# Altium PCB PCB_TRANSCIEVER.PcbDoc (part 1 of 2)
Units mm, origin at the board's own origin, x right, y up, seen from the top; angles counter-clockwise.
Board outline 68.83 x 64.26 mm, 4 copper layers (TOP, GND, 3v3, BOT), stack 1.554 mm thick; 95 components, 64 nets, 336 pads, 537 vias.
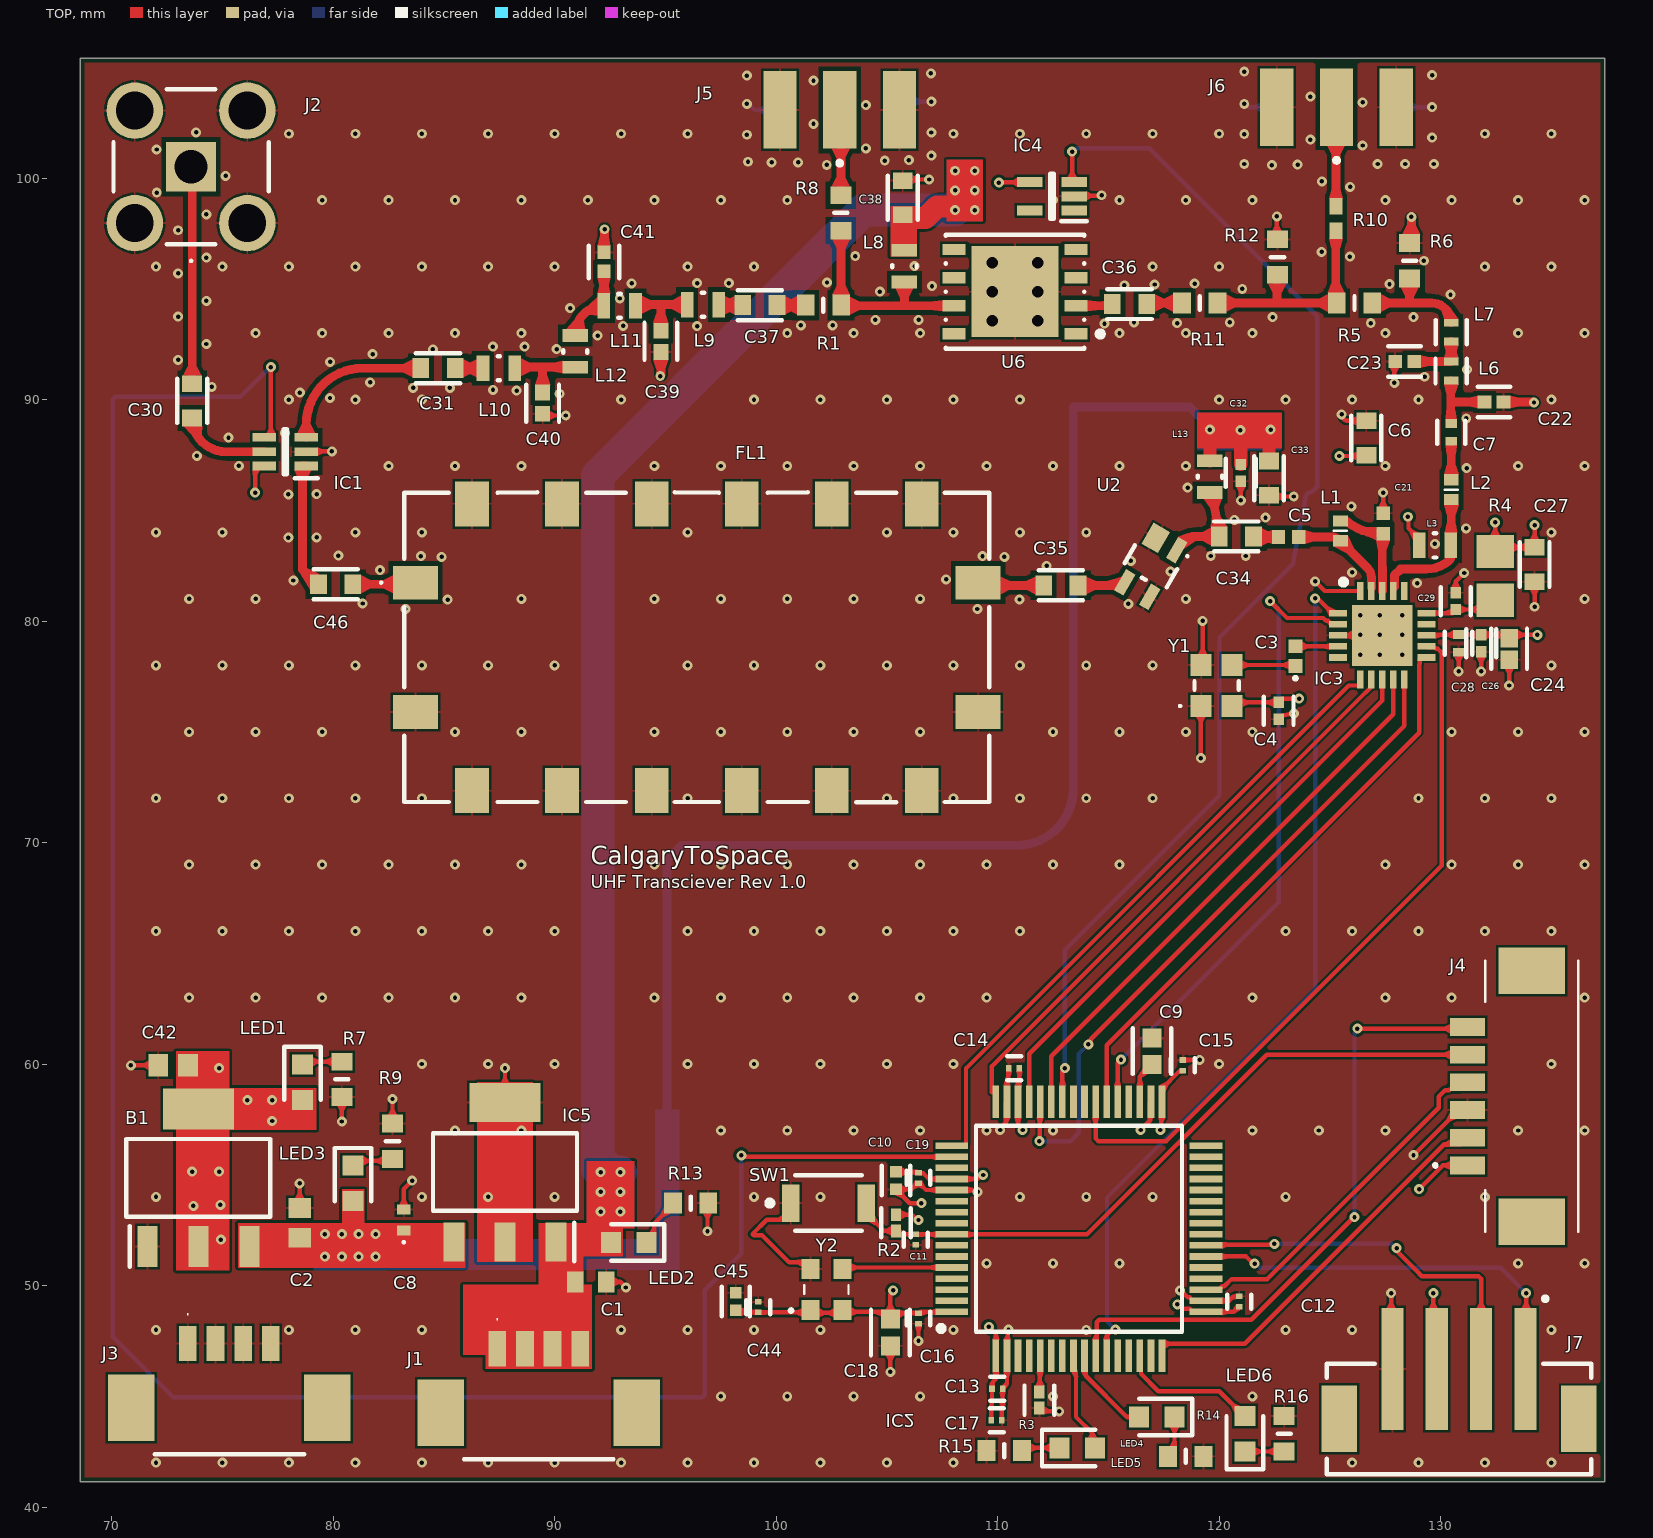
[diagram p0: TOP view]
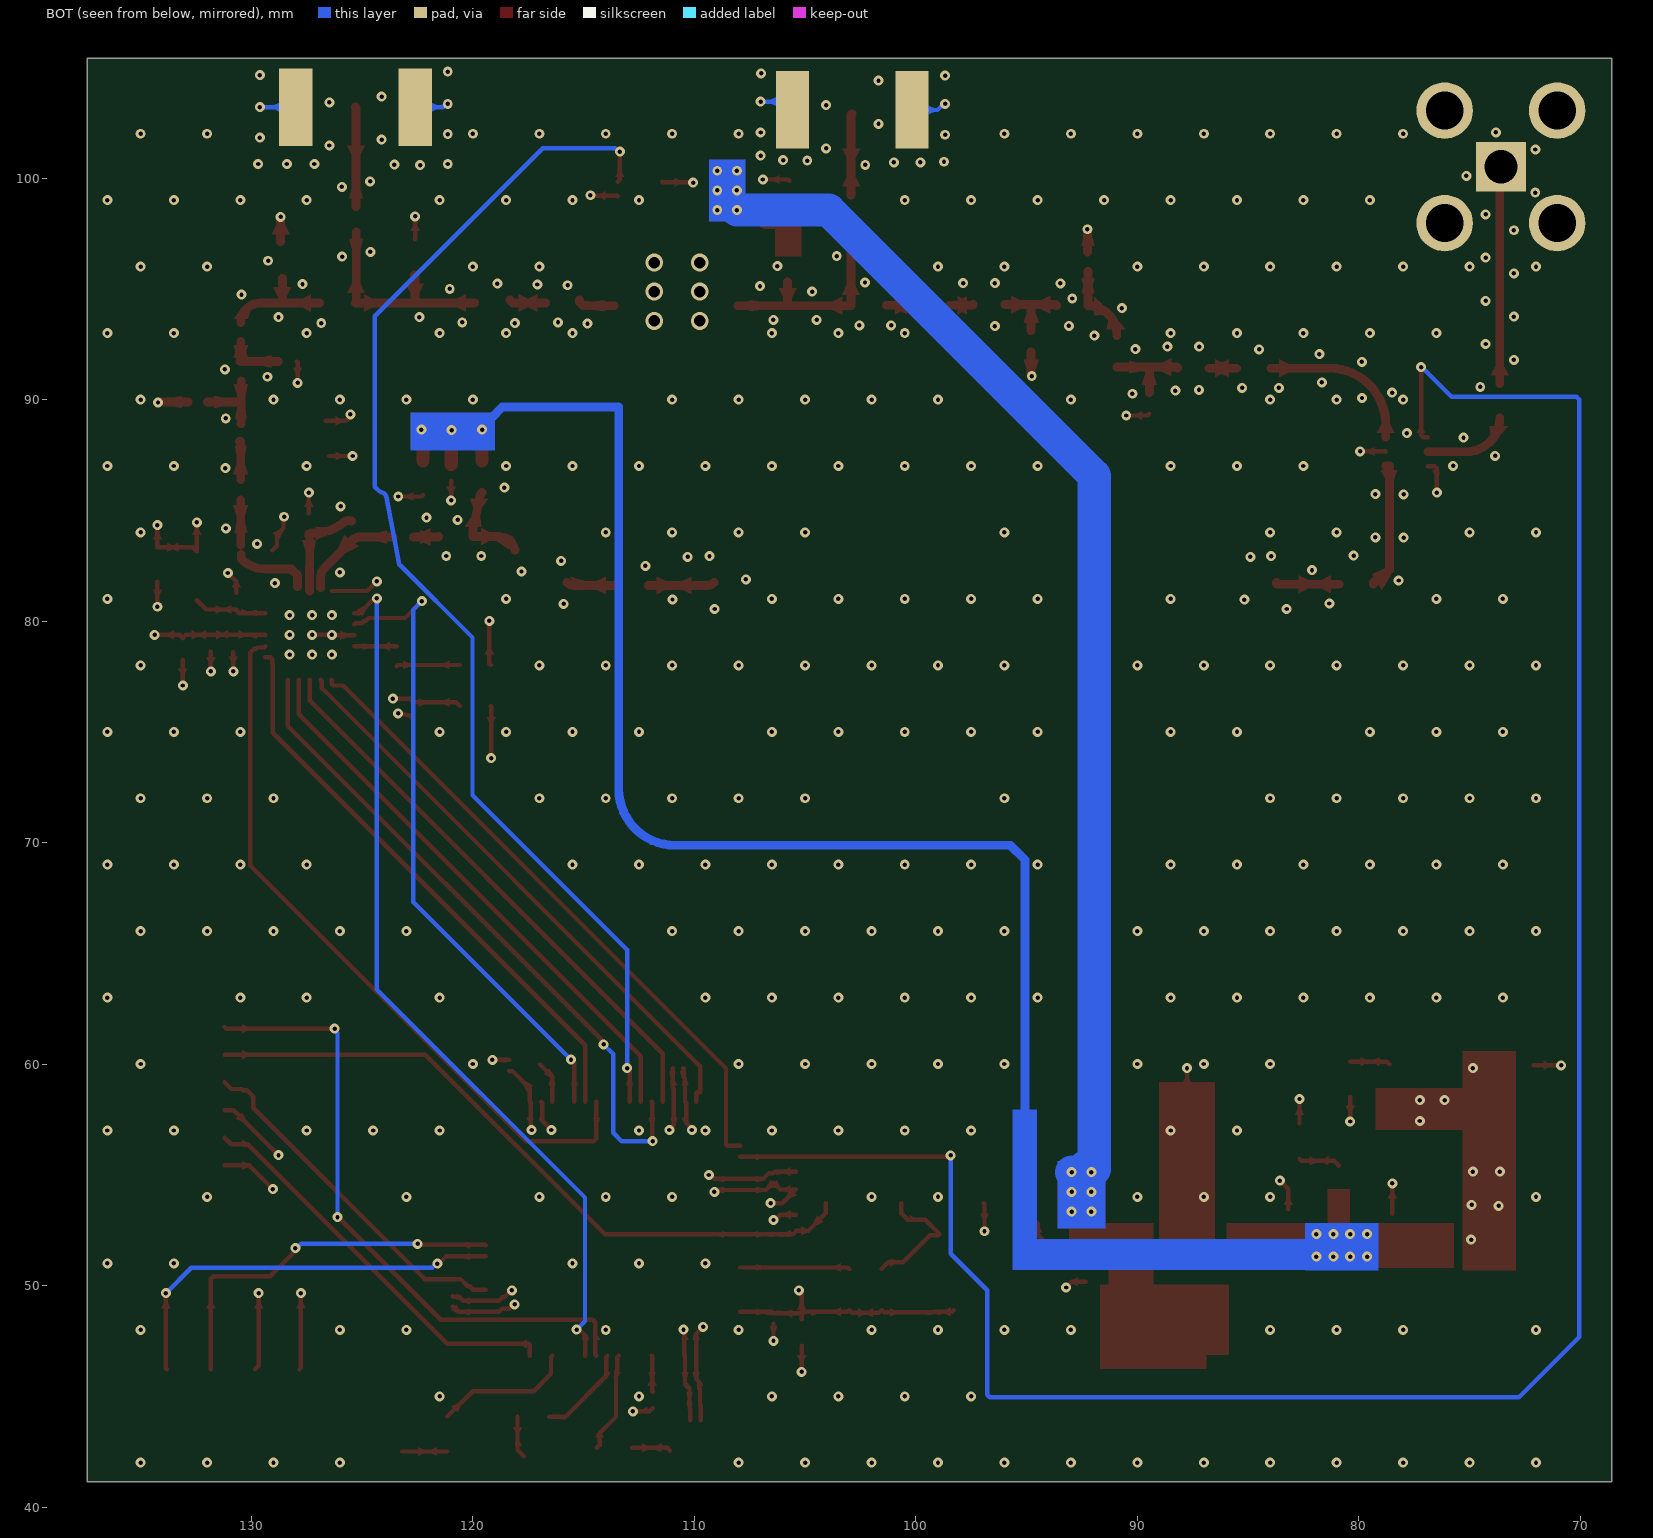
[diagram p1: BOT view, seen from below]
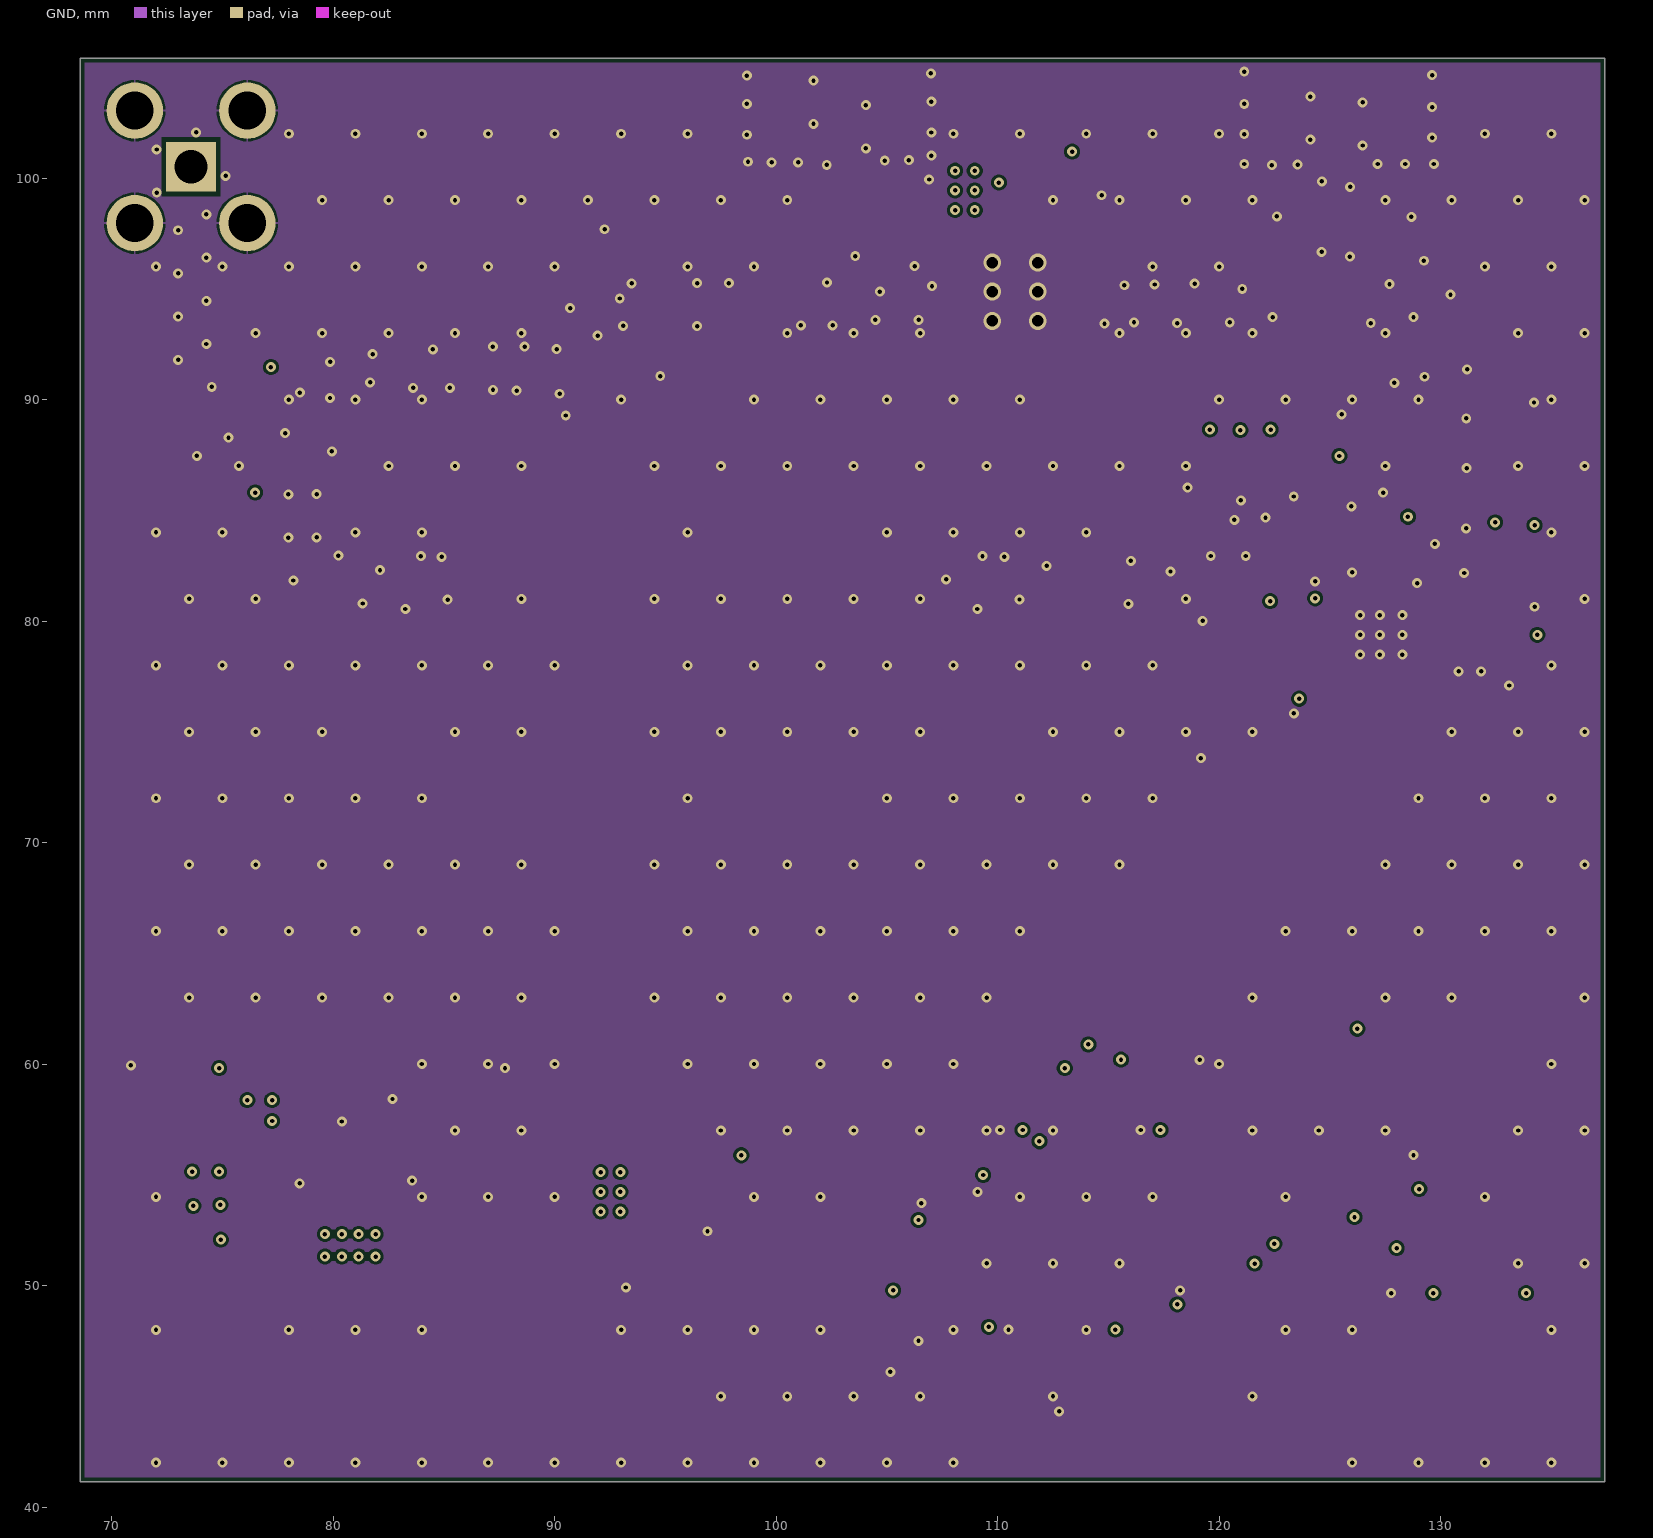
[diagram p2: GND]
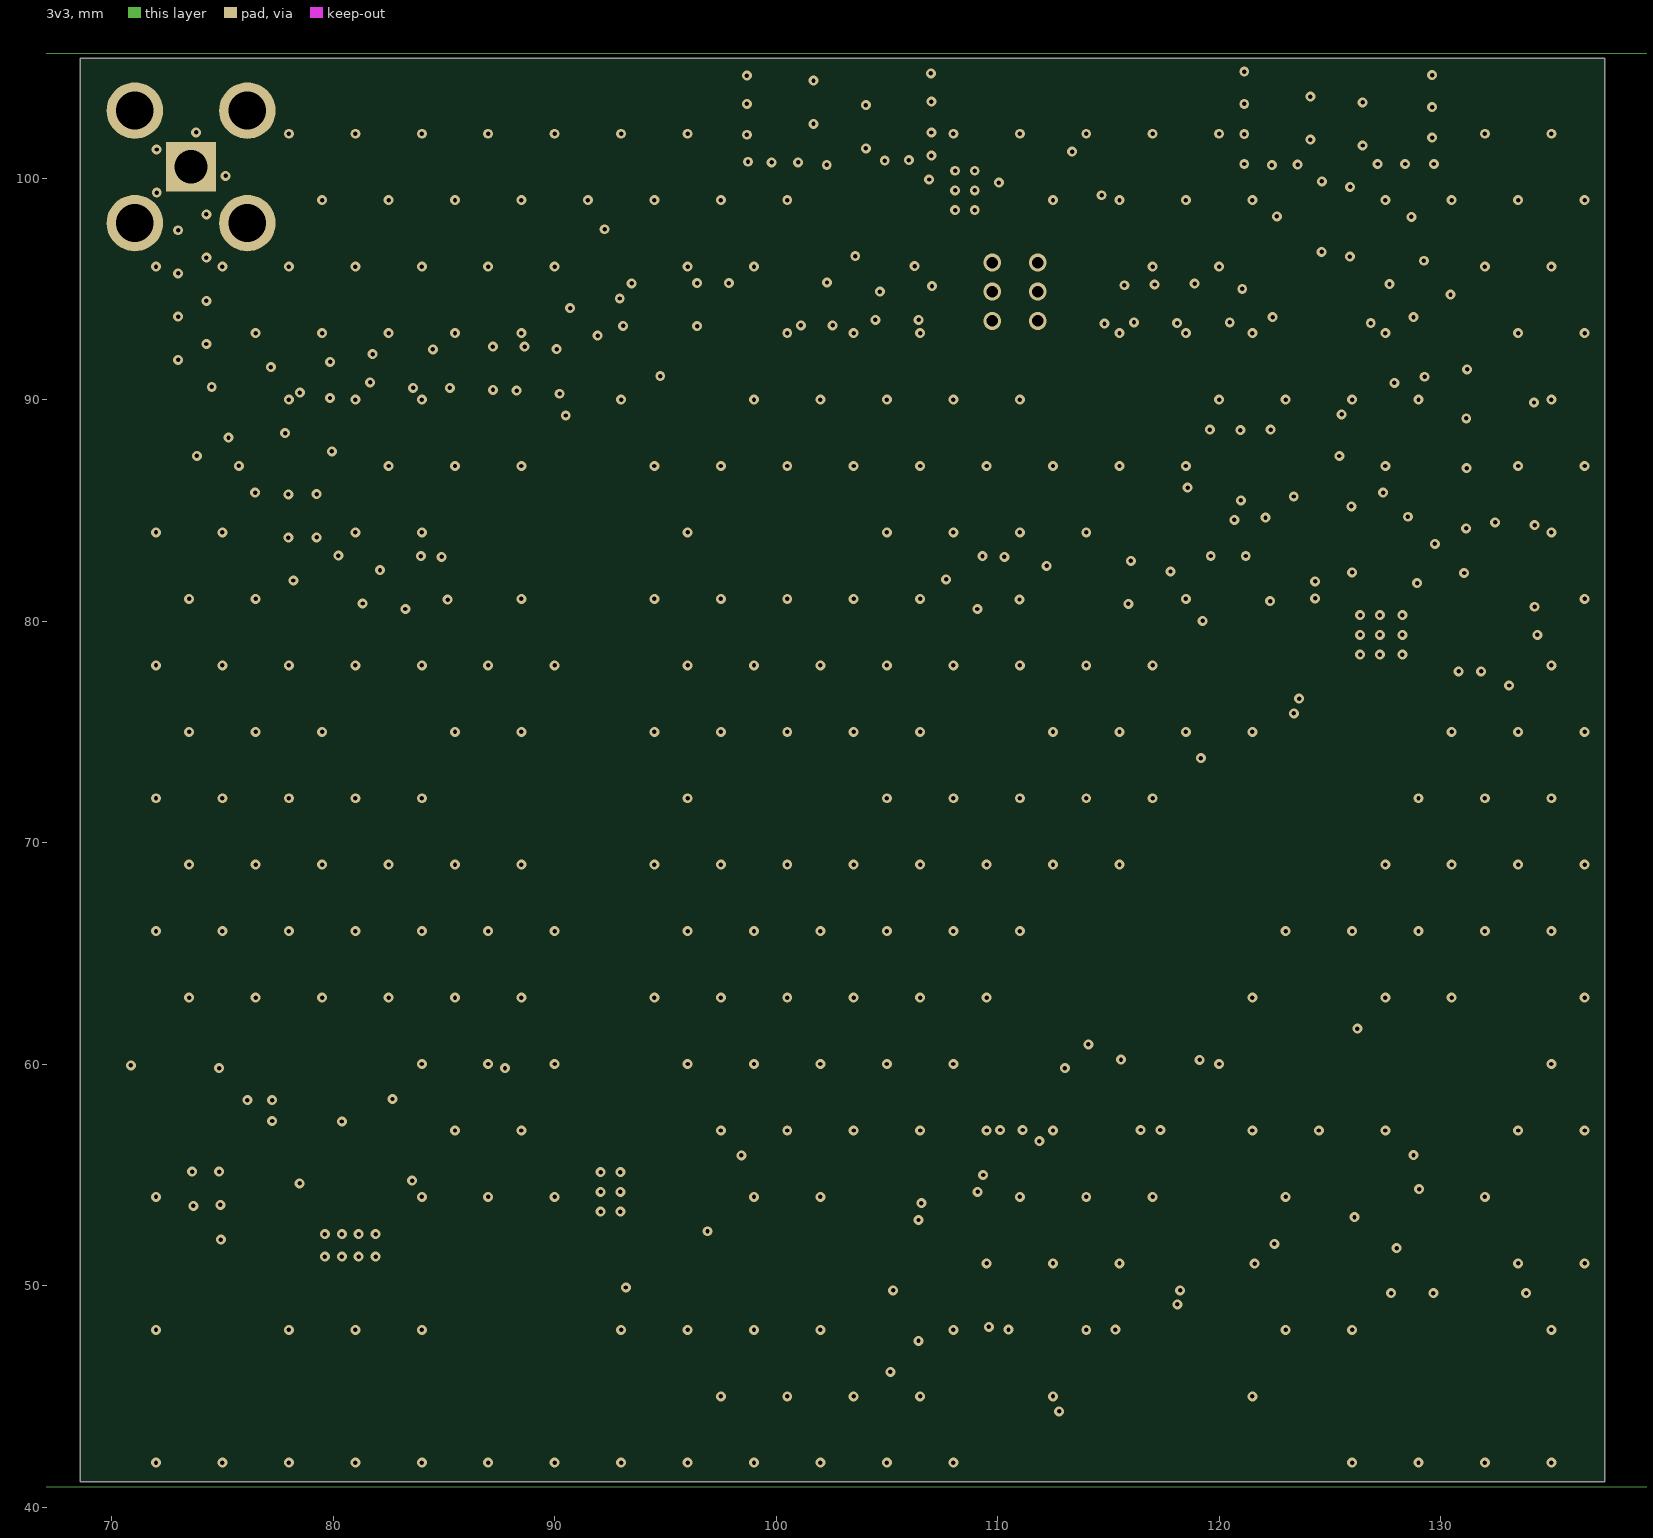
[diagram p3: 3v3]
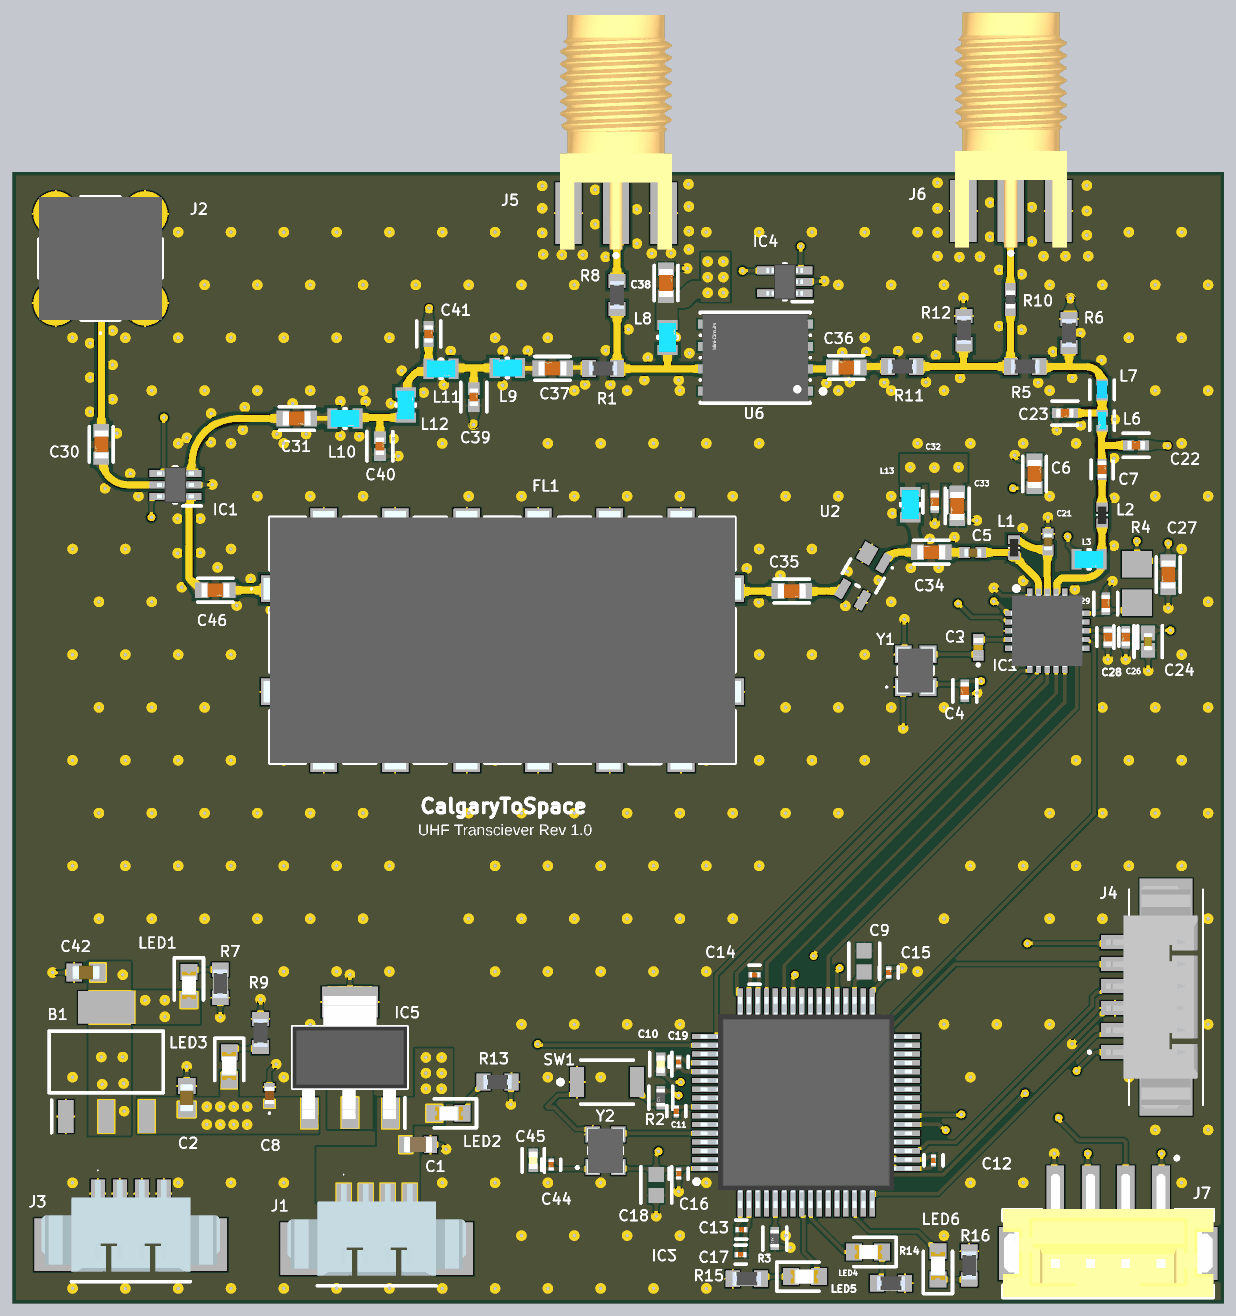
[diagram p5: 3D render of the assembled board from above, using the file's embedded part models]

## Layer stack, top to bottom
Top Solder: solder mask 0.0152, Solder Resist, Dk 3.8
TOP: signal copper 0.035
Dielectric 1: prepreg 0.218, NP-155F, Dk 4.4
Dielectric 2: prepreg 0.0764, NP-155F, Dk 3.91
GND: signal copper 0.0152
Dielectric 3: core 0.865, NP-155F, Dk 4.43
3v3: signal copper 0.0152
Dielectric 4: prepreg 0.0764, NP-155F, Dk 3.91
Dielectric 5: prepreg 0.218, NP-155F, Dk 4.4
BOT: signal copper 0.035
Bottom Solder: solder mask 0.0152, Solder Resist, Dk 3.8

## Board outline
68.58,41.148 68.58,105.41 137.414,105.41 137.414,41.148

## Design rules (kind name [scope] priority, off if disabled: settings)
BoardOutlineClearance [All] p1: gap=0.2 ignorepadtopadclearanceinfootprint=FALSE
Clearance CPWG_NEARIC [InNetClass('RF') vs InNet('GND') And InComponent('IC3')] p1: gap=0.125 ignorepadtopadclearanceinfootprint=FALSE
Clearance CPWG [InNetClass('RF') vs InNet('GND')] p2: gap=0.2 ignorepadtopadclearanceinfootprint=FALSE
Clearance Clearance_1 [All] p3: gap=0.102 ignorepadtopadclearanceinfootprint=FALSE except(0.127: Arc-Via Track-Via SMDPad-Via THPad-Via Via-Via Via-Fill Via-Poly Via-Region Via-Text; 0.15: THPad-THPad; 0.25: Arc-Hole Track-Hole SMDPad-Hole THPad-Hole Via-Hole Fill-Hole Poly-Hole Region-Hole Text-Hole)
ComponentClearance [All] p1: gap=0.102 collisioncheckmode=3 verticalgap=0.102 showdistances=TRUE
DiffPairsRouting [All] p1: maxlimit=0.102 minlimit=0.102 mostfreqgap=0.102 toplayer_minwidth=0.102 toplayer_maxwidth=1816.048 toplayer_prefwidth=0.102 midlayer1_minwidth=0.102 midlayer1_maxwidth=1816.048 midlayer1_prefwidth=0.102 midlayer2_minwidth=0.102 midlayer2_maxwidth=1816.048 midlayer2_prefwidth=0.102 bottomlayer_minwidth=0.102 bottomlayer_maxwidth=1816.048 bottomlayer_prefwidth=0.102 maxuncoupledlength=12.7
Height [All] p1: minheight=0 maxheight=1816.048 prefheight=12.7
HoleSize [All] p1: absolutevalues=TRUE maxlimit=6.3 minlimit=0.2 maxpercent=80.000 minpercent=20.000
HoleToHoleClearance [All] p1: gap=0.25 allowstackedmicrovias=FALSE
MaxMinImpedance "Schematic Impedance Constraint_1" [InNetClass('RF')] p1: minimum=50.00 maximum=50.00
MinimumAnnularRing [All] p1: minimumring=0.076
MinimumSolderMaskSliver [All] p1: minsoldermaskwidth=0
PlaneClearance [All] p1: clearance=0.102
PlaneConnect PlaneConnectPowerPads [InPadClass('PowerPads')] p1: planeconnectstyle=Direct reliefexpansion=0.508 reliefentries=4 reliefconductorwidth=0.254 reliefairgap=0.254
PlaneConnect [All] p2: pad.planeconnectstyle=Relief pad.reliefexpansion=0.3 pad.reliefentries=4 pad.reliefconductorwidth=0.102 pad.reliefairgap=0.102 via.planeconnectstyle=Direct via.reliefexpansion=0.3 via.reliefentries=4 via.reliefconductorwidth=0.127 via.reliefairgap=0.127
PolygonConnect PolygonConnectPowerPads [All vs (InPadClass('PowerPads'))] p1: connectstyle=Direct reliefconductorwidth=0.254 reliefentries=4 polygonreliefangle="90 Angle" airgapwidth=0.254
PolygonConnect [All] p2: thpad.connectstyle=Relief thpad.reliefconductorwidth=0.102 thpad.reliefentries=4 thpad.polygonreliefangle="90 Angle" thpad.airgapwidth=0.102 smdpad.connectstyle=Relief smdpad.reliefconductorwidth=0.102 smdpad.reliefentries=4 smdpad.polygonreliefangle="90 Angle" smdpad.airgapwidth=0.102 via.connectstyle=Direct via.reliefconductorwidth=0.127 via.reliefentries=4 via.polygonreliefangle="90 Angle" via.airgapwidth=0.127
RoutingVias [All] p1: holewidth=0.2 width=0.45 viastyle="Through Hole" minholewidth=0.2 minwidth=0.45 maxholewidth=6.3 maxwidth=6.55 viatemplateguid#1={1691019E-FDFA-4216-BD2A-34D3C3097EAC} viatemplatename#1=v45h20
SilkToSilkClearance [All] p1: silktosilkclearance=0
SilkToSolderMaskClearance [IsPad] p1: minsilkscreentomaskgap=0.102 clearancetoexposedcopper=TRUE
SolderMaskExpansion [All] p1: expansion=0.075 istentingtop=FALSE
SupplyNets "Schematic Supply Nets" [InNet('12V')] p1: voltage=0.000
SupplyNets "Schematic Supply Nets_2" [InNet('GND')] p2: voltage=0.000
SupplyNets "Schematic Supply Nets_3" [InNet('3V3')] p3: voltage=0.000
SupplyNets "Schematic Supply Nets_7" [InNet('+5V')] p4: voltage=0.000
UnRoutedNet [All] p1: checkbadconnections=TRUE
Width Width_1 [Not InNetClass('RF')] p1: maxlimit=5 minlimit=0.15 preferedwidth=0.2 minimp=50.000000 maximp=50.000000 favimp=50.000000
Width [InNetClass('RF')] p2: maxlimit=1816.048 minlimit=0.102 preferedwidth=0.4 toplayer_minwidth=0.4 toplayer_maxwidth=0.4 bottomlayer_minwidth=0.4 bottomlayer_maxwidth=0.4 impedanceprofiledriven=TRUE impedanceprofileid={D937DB2E-A1DA-42B8-B0BA-F8F9A3893C23} impedanceprofilevalue=50.000000 minimp=50.000000 maximp=50.000000 favimp=50.000000
19 further rules are at their usual default settings.

## Classes and differential pairs
net class RF: NetC5_1 NetC7_1 NetC7_2 NetC23_2 NetC30_1 NetC30_2 NetC31_1 NetC31_2 NetC34_2 NetC35_1 NetC35_2 NetC36_1 NetC36_2 NetC37_1 NetC37_2 NetC39_2 NetC40_2 NetC41_1 NetC46_1 NetC46_2 NetL7_1 NetL8_1 NetR5_1 RX_N RX_P SI_TEST SMA_PA_OUT TX
component class SW+ANT: C30 C31 IC1 J2
component class STM32: C9 C10 C11 C12 C13 C14 C15 C16 C17 C18 C19 C44 C45 IC2 J4 J7 LED4 LED5 LED6 R2 R3 R14 R15 R16 SW1 U8 Y2
component class Power: B1 C1 C2 C8 C42 IC5 J1 J3 LED1 LED2 LED3 R7 R9 R13
component class LPF: C36 C37 C38 C39 C40 C41 IC4 J5 L8 L9 L10 L11 L12 R1 R8 U6
component class Chip: C3 C4 C5 C6 C7 C21 C22 C23 C24 C26 C27 C28 C29 IC3 J6 L1 L2 L3 L6 L7 R4 R5 R6 R10 R11 R12 Y1 z
component class BPF+LNA: C32 C33 C34 C35 C46 FL1 L13 U2

## Components (designator, comment, footprint, x,y, rotation, side; value= is the part's Value field where it differs from the comment)
B1 "AZ1117IH-3.3TRG1" SOT230P700X180-4N#1 73.914,54.864 r90 top
C1 "0.47uF" CAPC1608X90N 91.629,50.165 r180 top
C2 "22uF" CAPC1608X100N 78.486,52.832 r90 top
C3 "1000pF" C0402 123.444,78.417 r90 top
C4 "100 nF" FP-GCM155-0_05-IPC_C 122.682,75.946 r270 top
C5 "5.6pF" CAPC1005X55N 123.139,83.795 r0 top
C6 "100 pF" FP-GQM187-0_15-MFG 126.644,88.265 r90 top
C7 "8.2 pF" FP-GJM155-0_05-MFG 130.48,88.519 r90 top
C8 "10uF" GRM15x 83.185,52.959 r90 top
C9 "4.7 uF" FP-GRM188-0_15-IPC_C 116.967,60.579 r90 top
C10 "1 uF" FP-C0402C105K9PACTU-MFG 105.41,54.737 r270 top
C11 "0.1 uF" FP-GRM033-0_03-MFG 106.299,52.07 r90 top
C12 "0.1 uF" FP-GRM033-0_03-MFG 120.904,49.276 r270 top
C13 "0.1 uF" FP-GRM033-0_03-MFG 109.982,45.339 r180 top
C14 "0.1 uF" FP-GRM033-0_03-MFG 110.744,59.817 r0 top
C15 "0.1 uF" FP-GRM033-0_03-MFG 118.364,59.944 r270 top
C16 "0.1 uF" FP-GRM033-0_03-MFG 106.426,48.514 r90 top
C17 "0.1 uF" FP-GRM033-0_03-MFG 109.957,43.917 r180 top
C18 "4.7 uF" FP-GRM188-0_15-IPC_C 105.156,47.879 r270 top
C19 "0.1 uF" FP-GRM033-0_03-MFG 106.426,54.864 r270 top
C21 "4pF" CAPC1005X55N 127.406,84.404 r270 top
C22 "13 pF" FP-GJM155-0_05-IPC_B 132.41,89.891 r180 top
C23 "9.1 pF" FP-GJM155-0_05-IPC_B 128.372,91.719 r0 top
C24 "2.2 uF" FP-GRM155-0_2-IPC_A 133.096,78.74 r270 top
C26 "100 nF" FP-GCM155-0_05-IPC_C 131.826,78.994 r270 top
C27 "100 pF" FP-GQM187-0_15-MFG 134.239,82.55 r270 top
C28 "33 pF" FP-GJM155-0_05-MFG 130.81,78.994 r270 top
C29 "100 nF" FP-GCM155-0_05-IPC_C 130.683,80.899 r90 top
C30 "100 pF" FP-GQM187-0_15-MFG 73.635,89.941 r270 top
C31 "100 pF" FP-GQM187-0_15-MFG 84.734,91.415 r0 top
C32 "100 nF" FP-GCM155-0_05-IPC_C 120.98,86.688 r270 top
C33 "100 pF" FP-GQM187-0_15-MFG 122.25,86.449 r270 top
C34 "100 pF" FP-GQM187-0_15-MFG 120.777,83.82 r180 top
C35 "100 pF" FP-GQM187-0_15-MFG 112.852,81.61 r0 top
C36 "100 pF" FP-GQM187-0_15-MFG 115.951,94.31 r180 top
C37 "100 pF" FP-GQM187-0_15-MFG 99.263,94.259 r180 top
C38 "100 pF" FP-GQM187-0_15-MFG 105.715,99.111 r90 top
C39 "9.8 pF" FP-GJM155-0_05-IPC_A 94.793,92.63 r90 top
C40 "9.8 pF" FP-GJM155-0_05-IPC_A 89.459,89.84 r90 top
C41 "11.0 pF" FP-GJM155-0_05-IPC_B 92.227,96.215 r90 top
C42 "22uF" CAPC1608X100N 72.771,59.944 r180 top
C44 "0.1 uF" FP-GRM033-0_03-MFG 99.187,49.022 r90 top
C45 "1 uF" FP-C0402C105K9PACTU-MFG 98.171,49.276 r90 top
C46 "100 pF" FP-GQM187-0_15-MFG 80.112,81.661 r0 top
FL1 "BPF-BV435+" BPFBV435 96.418,78.816 r0 top
IC1 "4259-63" SOT65P210X110-6N 77.836,87.645 r180 top
IC2 "STM32F401RBT6" QFP50P1200X1200X160-64N 113.671,52.563 r0 top
IC3 "Si4463-B1B-FMR" QFN50P400X400X90-21N-D 127.364,79.356 r270 top
IC4 "MCP9700AT-E_LT" SOT65P210X110-5N 112.455,99.177 r180 top
IC5 "LM2940IMPX-5.0_NOPB" SOT230P700X180-4N#2 87.757,55.118 r90 top
J1 "0532610471" 0532610471 89.281,46.355 r0 top
J2 "RFPC-SMA28-F" RFPCSMA28F 73.584,100.508 r90 top
J3 "0532610471" 0532610471 75.311,46.584 r0 top
J4 "53261-0671" 532610671 134.112,58.547 r90 top
J5 "CON-SMA-EDGE-S" RFSOLUTIONS_CON-SMA-EDGE-S 102.87,103.073 r270 top
J6 "CON-SMA-EDGE-S" RFSOLUTIONS_CON-SMA-EDGE-S 125.298,103.2 r270 top
J7 "B4B-PH-SM4-TB_LF__SN_" B4B-PH-SM4_1 130.826,41.478 r180 top
L1 "40nH" LQW15CNR20J00B 125.476,84.074 r90 top
L2 "33nH" LQW15CNR20J00B 130.48,85.928 r90 top
L3 "220 nH" FP-LQW18AN_80-MFG 129.743,83.414 r0 top
L6 "27 nH" FP-LQW15AN_00-W0_5-0_1-MFG 130.48,91.288 r270 top
L7 "22 nH" FP-LQW15AN_00-W0_6-0_1-MFG 130.48,93.04 r270 top
L8 "220 nH" FP-LQW18AN_80-MFG 105.791,96.021 r90 top
L9 "17 nH" FP-LQW18AN_80-MFG 96.698,94.285 r180 top
L10 "17 nH" FP-LQW18AN_80-MFG 87.478,91.415 r0 top
L11 "36 nH" FP-LQW18AN_80-MFG 92.935,94.234 r0 top
L12 "36 nH" FP-LQW18AN_80-MFG 90.932,92.177 r90 top
L13 "220 nH" FP-LQW18AN_80-MFG 119.583,86.516 r270 top
LED1 "LTST-C190KGKT" LEDC1608X80N 78.613,59.182 r270 top
LED2 "LTST-C190KGKT" LEDC1608X80N 93.345,51.943 r180 top
LED3 "LTST-C190KGKT" LEDC1608X80N 80.899,54.61 r270 top
LED4 "LTST-C190KGKT" LEDC1608X80N 117.183,44.069 r180 top
LED5 "LTST-C190KGKT" LEDC1608X80N 113.602,42.672 r0 top
LED6 "LTST-C190KGKT" LEDC1608X80N 121.158,43.307 r90 top
R1 "0R" RESC1608X55N 102.133,94.259 r0 top
R2 "10k" FP-RMCF0402-IPC_C 105.41,52.832 r90 top
R3 "10k" FP-RMCF0402-IPC_C 111.887,44.831 r90 top
R4 "4R7" RESC3216X65X100LL20T15 132.461,82.042 r270 top
R5 "0R" RESC1608X55N 126.111,94.361 r0 top
R6 "0R" RESC1608X55N 128.6,96.266 r270 top
R7 "1k" RESC1608X55N 80.391,59.309 r270 top
R8 "0R" RESC1608X55N 102.921,98.425 r270 top
R9 "1k" RESC1608X55N 82.677,56.515 r90 top
R10 "0R" RESC1005X40N 125.273,98.171 r270 top
R11 "0R" RESC1608X55N 119.126,94.361 r0 top
R12 "0R" RESC1608X55N 122.631,96.431 r270 top
R13 "4.7k" RESC1608X55N 96.139,53.721 r180 top
R14 "1k" RESC1608X55N 118.491,42.291 r0 top
R15 "1k" RESC1608X55N 110.299,42.545 r180 top
R16 "1k" RESC1608X55N 122.936,43.307 r90 top
SW1 "B3U-1000P" OMRON-B3U-1000_V 102.362,53.721 r0 top
U2 "SPF5043Z" RFMD-SOT343-4_M 116.916,82.474 r240 top
U6 "PHA-202+" FP-DL1636-MFG 110.783,94.869 r180 top
Y1 "FT2MNTUM-30.0-T1" FT2MNTUM300T1 119.888,77.089 r90 top
Y2 "ECS-TXO-2520-33-250-AN-TR" ECSTXO252033250ANTR 102.272,49.82 r90 top

## Footprints (in the part's own frame and the unit in brackets; to place one, negate y for a bottom-side part, rotate by r counter-clockwise, add the part's x,y. Pads: shape width x height; smd on the part's side, far side on the other; paste and mask are expansions set on the pad)
0532610471 [mm]
  rect 0.8x1.6 smd: 1(-1.875,0.8) 2(-0.625,0.8) 3(0.625,0.8) 4(1.875,0.8)
  rect 2.1x3 smd: MP1(4.425,-2.1) MP2(-4.425,-2.1)
  silkscreen extent -3.37,-4.2 3.37,2.14, body extent -5.07,-3.63 5.07,1.57, height 3.4
532610671 [mm]
  rect 0.8x1.6 smd: 1(-3.125,2.9) 2(-1.875,2.9) 3(-0.625,2.9) 4(0.625,2.9) 5(1.875,2.9) 6(3.125,2.9)
  rect 2.1x3 smd: MP1(-5.675,0) MP2(5.675,0)
  silkscreen extent -6.12,-2.1 6.12,4.4, body extent -6.32,-1.8 6.32,3.4, height 3.4
B4B-PH-SM4_1 [mm]
  rect 1x5.5 smd: 1(-3,-4.75) 2(-1,-4.75) 3(1,-4.75) 4(3,-4.75)
  rect 1.6x3 smd: 5(5.4,-2.5) 6(-5.4,-2.5)
  silkscreen extent -5.97,-8.02 5.97,0, body extent -5.98,-7.03 5.97,-0.03, height 6.8
BPFBV435 [mm]
  rect 2.03x1.52 smd: 1(-12.7,2.92) 2(-12.7,-2.92) 9(12.7,-2.92) 10(12.7,2.92)
  rect 1.52x2.03 smd: 3(-10.15,-6.475) 4(-6.09,-6.475) 5(-2.03,-6.475) 6(2.03,-6.475) 7(6.09,-6.475) 8(10.15,-6.475) 11(10.15,6.475) 12(6.09,6.475) 13(2.03,6.475) 14(-2.03,6.475) 15(-6.09,6.475) 16(-10.15,6.475)
  silkscreen extent -14.3,-7 13.21,7, body extent -13.56,-7.34 13.56,7.34, height 6.45
C0402 [mm]
  rect 0.62x0.62 smd: 1(-0.45,0) 2(0.45,0)
  silkscreen extent -1.05,-0.05 -0.95,0.05, body extent -0.52,-0.27 0.53,0.28
CAPC1005X55N [mm]
  rect 0.6x0.62 smd: 1(-0.46,0) 2(0.46,0)
  body extent -0.5,-0.25 0.5,0.25, height 0.55
CAPC1608X90N [mm]
  rect 0.75x0.94 smd: 1(-0.7,0) 2(0.7,0)
  body extent -0.8,-0.45 0.8,0.45, height 0.8
CAPC1608X100N [mm]
  rect 0.89x1.02 smd: 1(-0.67,0) 2(0.67,0)
  body extent -0.8,-0.4 0.8,0.4, height 1
ECSTXO252033250ANTR [mm]
  rect 0.9x0.8 smd: 1(-0.925,0.725) 2(0.925,0.725) 3(0.925,-0.725) 4(-0.925,-0.725)
  silkscreen extent -1,-1 0.2,1.65, body extent -1.3,-1.04 1.3,1.04, height 1.1
FP-C0402C105K9PACTU-MFG [mm]
  rect 0.52x0.52 smd paste+0 mask+0: 1(-0.4,0) 2(0.4,0)
  silkscreen extent -0.67,-0.64 0.67,0.64, body extent -0.5,-0.25 0.5,0.25, height 0.55
FP-DL1636-MFG [mm]
  rect 1.02x0.51 smd paste+0 mask+0: 1(-2.755,1.905) 2(-2.755,0.635) 3(-2.755,-0.635) 4(-2.755,-1.905) 5(2.755,-1.905) 6(2.755,-0.635) 7(2.755,0.635) 8(2.755,1.905)
  rect 3.94x4.11 smd paste+0 mask+0: 9(0,0)
  silkscreen extent -3.97,-2.58 3.12,2.58, body extent -3,-2.45 3,2.45, height 0.9
FP-GCM155-0_05-IPC_C [mm]
  rect 0.515x0.472 smd paste+0 mask+0: 1(-0.379,0) 2(0.379,0)
  silkscreen extent -0.64,-0.67 0.64,0.67, body extent -0.5,-0.25 0.5,0.25, height 0.55
FP-GJM155-0_05-IPC_A [mm]
  rect 0.715x0.672 smd paste+0 mask+0: 1(-0.479,0) 2(0.479,0)
  silkscreen extent -0.84,-0.74 0.84,0.74, body extent -0.5,-0.25 0.5,0.25, height 0.55
FP-GJM155-0_05-IPC_B [mm]
  rect 0.615x0.572 smd paste+0 mask+0: 1(-0.429,0) 2(0.429,0)
  silkscreen extent -0.74,-0.69 0.74,0.69, body extent -0.5,-0.25 0.5,0.25, height 0.55
FP-GJM155-0_05-MFG [mm]
  rect 0.4x0.5 smd paste+0 mask+0: 1(-0.4,0) 2(0.4,0)
  silkscreen extent -0.53,-0.63 0.53,0.63, body extent -0.5,-0.25 0.5,0.25, height 0.55
FP-GQM187-0_15-MFG [mm]
  rect 0.75x0.9 smd paste+0 mask+0: 1(-0.775,0) 2(0.775,0)
  silkscreen extent -1,-0.67 1,0.67, body extent -0.8,-0.4 0.8,0.4, height 0.8
FP-GRM033-0_03-MFG [mm]
  rect 0.25x0.3 smd paste+0 mask+0: 1(-0.238,0) 2(0.238,0)
  silkscreen extent -0.32,-0.54 0.32,0.54, body extent -0.46,-0.27 0.46,0.27, height 0.25
FP-GRM155-0_2-IPC_A [mm]
  rect 0.828x0.806 smd paste+0 mask+0: 1(-0.489,0) 2(0.489,0)
  silkscreen extent -0.9,-0.8 0.9,0.8, body extent -0.5,-0.25 0.5,0.25, height 0.7
FP-GRM188-0_15-IPC_C [mm]
  rect 0.856x0.858 smd paste+0 mask+0: 1(-0.601,0) 2(0.601,0)
  silkscreen extent -1.03,-0.87 1.03,0.87
FP-LQW15AN_00-W0_5-0_1-MFG [mm]
  rect 0.35x0.65 smd paste+0 mask+0: 1(-0.425,0) 2(0.425,0)
  silkscreen extent -0.55,-0.71 0.55,0.7, body extent -0.5,-0.25 0.5,0.25, height 0.6
FP-LQW15AN_00-W0_6-0_1-MFG [mm]
  rect 0.35x0.65 smd paste+0 mask+0: 1(-0.425,0) 2(0.425,0)
  silkscreen extent -0.55,-0.7 0.55,0.7, body extent -0.5,-0.3 0.5,0.3, height 0.6
FP-LQW18AN_80-MFG [mm]
  rect 0.57x1.15 smd paste+0 mask+0: 1(-0.715,0) 2(0.715,0)
  silkscreen extent -0.06,-0.55 0.06,0.55, body extent -0.82,-0.5 0.82,0.5, height 1
FP-RMCF0402-IPC_C [mm]
  rect 0.581x0.472 smd paste+0 mask+0: 1(-0.366,0) 2(0.366,0)
  silkscreen extent -0.66,-0.67 0.66,0.67, body extent -0.5,-0.25 0.5,0.25, height 0.4
FT2MNTUM300T1 [mm]
  rect 1x0.95 smd: 1(-0.925,0.7) 2(0.925,0.7) 3(0.925,-0.7) 4(-0.925,-0.7)
  silkscreen extent -0.97,-1 0.2,1.7, body extent -1.33,-1.08 1.33,1.08, height 1.1
GRM15x [mm]
  rect 0.45x0.6 smd: 1(-0.475,0) 2(0.475,0)
  silkscreen extent -1.05,-0.05 -0.95,0.05, body extent -0.5,-0.28 0.5,0.27, height 0.5
LEDC1608X80N [mm]
  rect 0.9x0.95 smd: 1(-0.8,0) 2(0.8,0)
  silkscreen extent -1.6,-0.82 0.8,0.82, body extent -0.83,-0.4 0.77,0.4, height 0.8
LQW15CNR20J00B [mm]
  rect 0.5x0.66 smd: 1(-0.45,0) 2(0.45,0)
  silkscreen extent 0,-0.3 0,0.3, body extent -0.5,-0.25 0.5,0.25, height 0.6
OMRON-B3U-1000_V [mm] "SMD, 2-Leads, Body 3x2.5mm"
  rect 0.8x1.7 smd: 1(-1.7,0) 2(1.7,0)
  silkscreen extent -2.77,-1.25 1.5,1.25, body extent -1.5,-1.25 1.5,1.25, height 1.75
QFN50P400X400X90-21N-D [mm]
  rect 0.8x0.3 smd: 1(-2,-1) 2(-2,-0.5) 3(-2,0) 4(-2,0.5) 5(-2,1) 11(2,1) 12(2,0.5) 13(2,0) 14(2,-0.5) 15(2,-1)
  rect 0.3x0.8 smd: 6(-1,2) 7(-0.5,2) 8(0,2) 9(0.5,2) 10(1,2) 16(1,-2) 17(0.5,-2) 18(0,-2) 19(-0.5,-2) 20(-1,-2)
  rect 2.75x2.75 smd: 21(0,0)
  silkscreen extent -2.52,-1.87 -2.28,-1.62, body extent -2.05,-2.05 2.05,2.05, height 0.9
QFP50P1200X1200X160-64N [mm]
  rect 1.475x0.3 smd: 1(-5.738,-3.75) 2(-5.738,-3.25) 3(-5.738,-2.75) 4(-5.738,-2.25) 5(-5.738,-1.75) 6(-5.738,-1.25) 7(-5.738,-0.75) 8(-5.738,-0.25) 9(-5.738,0.25) 10(-5.738,0.75) 11(-5.738,1.25) 12(-5.738,1.75) 13(-5.738,2.25) 14(-5.738,2.75) 15(-5.738,3.25) 16(-5.738,3.75) 33(5.738,3.75) 34(5.738,3.25) 35(5.738,2.75) 36(5.738,2.25) 37(5.738,1.75) 38(5.738,1.25) 39(5.738,0.75) 40(5.738,0.25) 41(5.738,-0.25) 42(5.738,-0.75) 43(5.738,-1.25) 44(5.738,-1.75) 45(5.738,-2.25) 46(5.738,-2.75) 47(5.738,-3.25) 48(5.738,-3.75)
  rect 0.3x1.475 smd: 17(-3.75,5.738) 18(-3.25,5.738) 19(-2.75,5.738) 20(-2.25,5.738) 21(-1.75,5.738) 22(-1.25,5.738) 23(-0.75,5.738) 24(-0.25,5.738) 25(0.25,5.738) 26(0.75,5.738) 27(1.25,5.738) 28(1.75,5.738) 29(2.25,5.738) 30(2.75,5.738) 31(3.25,5.738) 32(3.75,5.738) 49(3.75,-5.738) 50(3.25,-5.738) 51(2.75,-5.738) 52(2.25,-5.738) 53(1.75,-5.738) 54(1.25,-5.738) 55(0.75,-5.738) 56(0.25,-5.738) 57(-0.25,-5.738) 58(-0.75,-5.738) 59(-1.25,-5.738) 60(-1.75,-5.738) 61(-2.25,-5.738) 62(-2.75,-5.738) 63(-3.25,-5.738) 64(-3.75,-5.738)
  silkscreen extent -6.35,-4.65 4.65,4.65, body extent -6,-6 6,6, height 1.6
RESC1005X40N [mm]
  rect 0.75x0.6 smd: 1(-0.55,0) 2(0.55,0)
  body extent -0.5,-0.25 0.5,0.25, height 0.4
RESC1608X55N [mm]
  rect 0.8x0.95 smd: 1(-0.8,0) 2(0.8,0)
  silkscreen extent 0,-0.3 0,0.3, body extent -0.8,-0.4 0.8,0.4, height 0.46
RESC3216X65X100LL20T15 [mm] "Chip Resistor, 2-Leads, Body 3.20x1.60mm, IPC High Density"
  rect 1.5x1.7 smd: 1(-1.1,0) 2(1.1,0)
  body extent -1.7,-0.9 1.7,0.9, height 0.65
RFMD-SOT343-4_M [mm] "SOT343, 4-Leads, Body 1.34x2.20mm, Pitch 1.30mm, IPC Low Density"
  rect 1.1x0.5 smd: 1(-1.22,0.65) 3(1.22,-0.65) 4(1.22,0.65)
  rect 1.1x0.85 smd: 2(-1.22,-0.45)
  silkscreen extent -1.27,-1.1 0.65,1.25, body extent -0.67,-1.1 0.67,1.1, height 0.94
RFPCSMA28F [mm]
  rect 2.25x2.25 hole 1.5: 1(0,0)
  round 2.55 hole 1.7: 2(-2.54,-2.54) 3(2.54,-2.54) 4(2.54,2.54) 5(-2.54,2.54)
  silkscreen extent -4.3,-3.5 3.5,3.5, body extent -3.5,-3.5 3.5,3.5, height 9.9
RFSOLUTIONS_CON-SMA-EDGE-S [mm]
  rect 3.5x1.5 smd: 1(0,0) G1(0,2.7) G2(0,-2.7)
  rect 3.5x1.5 smd far side: G3(0,2.7) G4(0,-2.7)
  silkscreen extent 2.3,-0.1 2.5,0.1, body extent -11.27,-3.18 2.06,3.18, height 3.55
SOT65P210X110-5N [mm]
  rect 1.15x0.45 smd: 1(-1,0.65) 2(-1,0) 3(-1,-0.65) 4(1,-0.65) 5(1,0.65)
  silkscreen extent -1.58,-1.01 0.08,1.12, body extent -1.05,-1.01 1.05,1.01, height 1.1
SOT65P210X110-6N [mm]
  rect 1.05x0.4 smd: 1(-0.95,0.65) 2(-0.95,0) 3(-0.95,-0.65) 4(0.95,-0.65) 5(0.95,0) 6(0.95,0.65)
  silkscreen extent -1.48,-1.02 0.08,1.2, body extent -1.05,-1.02 1.05,1.02, height 1.1
SOT230P700X180-4N#1 [mm]
  rect 1.85x0.9 smd: 1(-3.1,2.3) 2(-3.1,0) 3(-3.1,-2.3)
  rect 1.85x3.2 smd: 4(3.1,0)
  silkscreen extent -4.03,-3.25 1.75,3.25
SOT230P700X180-4N#2 [mm]
  rect 1.75x0.95 smd: 1(-3.15,-2.3) 2(-3.15,0) 3(-3.15,2.3)
  rect 1.75x3.2 smd: 4(3.15,0)
  silkscreen extent -4.03,-3.25 1.75,3.25, body extent -3.5,-3.25 3.5,3.25, height 1.68

## Part data
B1: library part CMP-027-000000-1, "LDO Voltage Regulators LDO BJT HiCurr 1.35A 10Hz to 10KHz", Manufacturer_Name="Diodes Incorporated", Mouser Part Number=621-AZ1117IH-3.3TRG1, Arrow Part Number=AZ1117IH-3.3TRG1, Arrow Price/Stock=https://www.arrow.com/en/products/az1117ih-3.3trg1/diodes-incorporated?utm_currency=USD&region=europe, Datasheet Link=https://www.diodes.com//assets/Datasheets/AZ1117I.pdf, Design Item ID=AZ1117IH-3.3TRG1, Geometry.Height=1.8mm, Manufacturer_Part_Number=AZ1117IH-3.3TRG1, Mouser Price/Stock=https://www.mouser.co.uk/ProductDetail/Diodes-Incorporated/AZ1117IH-3.3TRG1?qs=cpo3%2FpBou2jnS4SxLgAVoA%3D%3D, Source=AZ1117IH-3.3TRG1.SchLib
C1: library part GRM188R61H474KA12D, "GRM188R61H474KA12D", Manufacturer_Name="Murata Electronics", Mouser Part Number=81-GRM188R61H474KA2D, Arrow Part Number=GRM188R61H474KA12D, Arrow Price/Stock=https://www.arrow.com/en/products/grm188r61h474ka12d/murata-manufacturing, Datasheet Link=https://search.murata.co.jp/Ceramy/image/img/A01X/G101/ENG/GRM188R61H474KA12-04A.pdf, Height=0.9mm, Manufacturer_Part_Number=GRM188R61H474KA12D, Mouser Price/Stock=https://www.mouser.co.uk/ProductDetail/Murata-Electronics/GRM188R61H474KA12D?qs=4W3PNmGdEWHPXU2UiOr6Bg%3D%3D
C2 C42: library part CC0603MRX5R6BB226, "CC0603MRX5R6BB226", Manufacturer_Name="Yageo Group", Mouser Part Number=603-CC603MRX5R6BB226, Datasheet Link=https://www.yageo.com/upload/media/product/productsearch/datasheet/mlcc/UPY-GPHC_X5R_4V-to-50V_30.pdf, Height=1mm, Manufacturer_Part_Number=CC0603MRX5R6BB226, Mouser Price/Stock=https://www.mouser.co.uk/ProductDetail/YAGEO/CC0603MRX5R6BB226?qs=IvkZ4pJZlB3K%252BVkAL36Ang%3D%3D
C3: library part C0402C102K5RAC-TU, "C0402C102K5RAC-TU", Manufacturer_Name="Yageo Group", Datasheet Link=https://www.kemet.com/specsheet/C0402C102K5RACTU, Height=0.55mm, Manufacturer_Part_Number=C0402C102K5RAC-TU
C4 C26 C29 C32: library part CMP-2008-03711-3, "Ceramic Capacitor for Automotive 100nF ±10% 16VDC X7R 0402 Paper T/R Name: GCM155R71C104KA55D", Capacitance=100nF, Case Code (Imperial)=0402, Case Code (Metric)=1005, Dielectric=X7R, Max Operating Temperature=125°C, Min Operating Temperature=-55°C, Package Quantity=1, Ratings=AEC-Q200, Tolerance=10%, Voltage=16V, Case/Package=0402, Depth=0.5mm, Height=0.5mm, Lead Free="Lead Free", Length=1mm, Mount="Surface Mount", Packaging="Tape and Reel", Radiation Hardening=No, REACH SVHC="No SVHC", Termination=SMD/SMT, Thickness=0.022inch, Voltage Rating=16V, Voltage Rating (DC)=16V, Width=0.02inch
C5: library part GJM1555C1H5R6BB01D, "GJM1555C1H5R6BB01D", Manufacturer_Name="Murata Electronics", Mouser Part Number=81-GJM1555C1H5R6BB1D, Arrow Part Number=GJM1555C1H5R6BB01D, Arrow Price/Stock=https://www.arrow.com/en/products/gjm1555c1h5r6bb01d/murata-manufacturing?region=nac, Datasheet Link=https://search.murata.co.jp/Ceramy/image/img/A01X/G101/ENG/GJM1555C1H5R6BB01-01A.pdf, Height=0.55mm, Manufacturer_Part_Number=GJM1555C1H5R6BB01D, Mouser Price/Stock=https://www.mouser.co.uk/ProductDetail/Murata-Electronics/GJM1555C1H5R6BB01D?qs=Er06SXQpt%252B61VPMQL%252BpEbg%3D%3D
C6 C27 C30 C31 C33 C34 C35 C36 C37 C38 C46: library part CMP-06035-018516-1, "Ceramic Capacitor 100pF ±5% 250VDC C0G 0603 Paper T/R Name: GQM1875C2E101JB12D", Capacitance=100pF, Case Code (Imperial)=0603, Case Code (Metric)=1608, Dielectric=C0G, Max Operating Temperature=125°C, Min Operating Temperature=-55°C, Package Quantity=4000, Tolerance=5%, Voltage Rating=250V, Case/Package=0603, Depth=0.8mm, Lead Free="Lead Free", Length=1.6mm, Mount="Surface Mount", Packaging="Tape and Reel", Termination=SMD/SMT, Thickness=0.031inch, Voltage Rating (DC)=250V, Width=0.031inch
C7: library part CMP-2008-03887-2, "Multi-Layer Ceramic Capacitor 8.2pF C0G  ±0.05pF 0402 Paper T/R", Capacitance=8.2pF, Case Code (Imperial)=0402, Case Code (Metric)=1005, Dielectric=C0G, Max Operating Temperature=125°C, Min Operating Temperature=-55°C, Package Quantity=10000, Voltage Rating=50V, Case/Package=0402, Depth=0.5mm, Height=0.5mm, Length=1mm, Mount="Surface Mount", Packaging="Tape and Reel", Radiation Hardening=No, Termination=SMD/SMT, Thickness=0.022inch, Voltage Rating (DC)=50V, Width=0.02inch
C8: library part GRM155R61A106ME11D, "GRM155R61A106ME11D", Manufacturer_Name="Murata Electronics", Mouser Part Number=81-GRM155R61A106ME1D, Arrow Part Number=GRM155R61A106ME11D, Arrow Price/Stock=https://www.arrow.com/en/products/grm155r61a106me11d/murata-manufacturing?utm_currency=USD&region=nac, Datasheet Link=https://search.murata.co.jp/Ceramy/image/img/A01X/G101/ENG/GRM155R61A106ME11-01A.pdf, Height=0.33mm, Manufacturer_Part_Number=GRM155R61A106ME11D, Mouser Price/Stock=https://www.mouser.co.uk/ProductDetail/Murata-Electronics/GRM155R61A106ME11D?qs=xZ%2FP%252Ba9zWqZMJSi57Q8OyA%3D%3D
C9 C18: library part CMP-2006-02523-2, "Chip Multilayer Ceramic Capacitors for General Purpose, 0603, 4.7uF, X5R, 15%, 10%, 25V Name: GRM188R61E475KE11D", Capacitance=4.7uF, Case Code (Imperial)=0603, Case Code (Metric)=1608, Dielectric=X5R, Max Operating Temperature=85°C, Min Operating Temperature=-55°C, Package Quantity=4000, Tolerance=10%, Voltage=25V, Case/Package=0603, Depth=0.8mm, Height=0.8mm, Lead Free="Lead Free", Length=1.6mm, Material=Ceramic, Mount="Surface Mount", Packaging="Cut Tape", REACH SVHC="No SVHC", Thickness=0.031inch, Voltage Rating=25V, Voltage Rating (DC)=25V, Width=0.031inch
C10 C45: library part CMP-2008-02075-2, "CAP CER 1UF 6.3V X5R 0402 Name: C0402C105K9PACTU", Capacitance=1uF, Case Code (Imperial)=0402, Dielectric=X5R, Dielectric Material=Ceramic, Max Operating Temperature=85°C, Min Operating Temperature=-55°C, Package Quantity=1, Tolerance=10%, Voltage=6.3V, Case/Package=0402, Construction=Flat, Depth=0.5mm, Height=0.5mm, Lead Free="Lead Free", Lead Pitch=0.3mm, Length=1mm, Mount="Surface Mount", Number of Pins=2, Packaging="Tape and Reel", Radiation Hardening=No, REACH SVHC="No SVHC", RoHS Compliant=Yes, Series=C, Termination=SMD/SMT, Thickness=0.022inch, Voltage Rating=6.3V, Voltage Rating (DC)=6.3V, Width=0.02inch
C11 C12 C13 C14 C15 C16 C17 C19 C44: library part CMP-06035-019037-1, "Chip Multilayer Ceramic Capacitors for General Purpose, 0201, 0.10uF, X7S, 22%, 10%, 16V Name: GRM033C71C104KE14D", Capacitance=100nF, Case Code (Imperial)=0201, Case Code (Metric)=0603, Dielectric=X7S, Max Operating Temperature=125°C, Min Operating Temperature=-55°C, Package Quantity=15000, Tolerance=10%, Voltage Rating=16V, Case/Package=0201, Height=0.3mm, Length=0.024inch, Mount="Surface Mount", Packaging="Tape and Reel", Termination=SMD/SMT, Thickness=0.013inch, Voltage Rating (DC)=16V, Weight=1.2E-05oz, Width=0.3mm
C21: library part GJM1555C1H4R0BB01D, "GJM1555C1H4R0BB01D", Manufacturer_Name="Murata Electronics", Mouser Part Number=81-GJM1555C1H4R0BB01, Datasheet Link=https://search.murata.co.jp/Ceramy/image/img/A01X/G101/ENG/GJM1555C1H4R0BB01-01A.pdf, Height=0.55mm, Manufacturer_Part_Number=GJM1555C1H4R0BB01D, Mouser Price/Stock=https://www.mouser.com/Search/Refine.aspx?Keyword=81-GJM1555C1H4R0BB01
C22: library part CMP-2008-03801-2, "Multi-Layer Ceramic Capacitor 13pF C0G  ±2% 0402 Paper T/R Name: GJM1555C1H130GB01D", Capacitance=13pF, Case Code (Imperial)=0402, Case Code (Metric)=1005, Dielectric=C0G, Max Operating Temperature=125°C, Min Operating Temperature=-55°C, Package Quantity=1, Tolerance=2%, Voltage Rating=50V, Case/Package=0402, Depth=0.5mm, Height=0.5mm, Length=1mm, Mount="Surface Mount", Packaging="Tape and Reel", Radiation Hardening=No, Termination=SMD/SMT, Thickness=0.022inch, Voltage Rating (DC)=50V, Width=0.5mm
C23: library part CMP-2008-03892-2, "Multi-Layer Ceramic Capacitor 9.1pF C0G  ±0.1pF 0402 Paper T/R Name: GJM1555C1H9R1BB01D", Capacitance=9.1pF, Case Code (Imperial)=0402, Case Code (Metric)=1005, Dielectric=C0G, Max Operating Temperature=125°C, Min Operating Temperature=-55°C, Package Quantity=10000, Voltage Rating=50V, Case/Package=0402, Depth=0.5mm, Height=0.5mm, Lead Free="Lead Free", Length=1mm, Mount="Surface Mount", Packaging="Tape and Reel", Radiation Hardening=No, Termination=SMD/SMT, Thickness=0.022inch, Voltage Rating (DC)=50V, Width=0.02inch
C24: library part CMP-06035-014902-1, "Chip Multilayer Ceramic Capacitors for General Purpose, 0402, 2.2uF, X7S, 22%, 10%, 6.3V Name: GRM155C70J225KE11D", Capacitance=2.2uF, Case Code (Imperial)=0402, Case Code (Metric)=1005, Dielectric=X7S, Max Operating Temperature=125°C, Min Operating Temperature=-55°C, Package Quantity=10000, Resistor Type=Ceramic, Tolerance=10%, Voltage Rating=6.3V, Case/Package=0402, Height=0.5mm, Length=0.039inch, Mount="Surface Mount", Packaging="Tape and Reel", Termination=SMD/SMT, Thickness=0.022inch, Voltage Rating (DC)=6.3V, Weight=0.000212oz, Width=0.02inch
C28: library part CMP-06035-057988-1, "Multi-Layer Ceramic Capacitor 33pF C0G  ±5% 0402 Paper T/R Name: GJM1555C1H330JB01D", Capacitance=33pF, Dielectric=C0G, Tolerance=5%, Voltage Rating (DC)=50V, Length=1mm, Thickness=500um, Width=500um
C39 C40: library part CMP-2008-03896-2, "Multi-Layer Ceramic Capacitor 9.8pF C0G  ±0.05pF 0402 Paper T/R Name: GJM1555C1H9R8WB01D", Capacitance=9.8pF, Case Code (Imperial)=0402, Case Code (Metric)=1005, Dielectric=C0G, Max Operating Temperature=125°C, Min Operating Temperature=-55°C, Package Quantity=10000, Voltage Rating=50V, Case/Package=0402, Depth=0.5mm, Height=0.5mm, Length=1mm, Mount="Surface Mount", Packaging="Tape and Reel", Radiation Hardening=No, Termination=SMD/SMT, Thickness=0.022inch, Voltage Rating (DC)=50V, Width=0.02inch
C41: library part CMP-2008-03798-2, "Multi-Layer Ceramic Capacitor 11pF C0G  ±2% 0402 Paper T/R Name: GJM1555C1H110GB01D", Capacitance=11pF, Case Code (Imperial)=0402, Case Code (Metric)=1005, Dielectric=C0G, Max Operating Temperature=125°C, Min Operating Temperature=-55°C, Package Quantity=10000, Tolerance=2%, Voltage Rating=50V, Case/Package=0402, Depth=0.5mm, Height=0.5mm, Lead Free="Lead Free", Length=1mm, Mount="Surface Mount", Packaging="Tape and Reel", Radiation Hardening=No, Termination=SMD/SMT, Thickness=0.022inch, Voltage Rating (DC)=50V, Width=0.5mm
FL1: "Filter", Manufacturer_Name=Mini-Circuits, Datasheet Link=https://eu.mouser.com/datasheet/3/3705/1/BPF_BV435.pdf, Height=6.35mm, Manufacturer_Part_Number=BPF-BV435+
IC1: "Integrated Circuit", Manufacturer_Name="Peregrine Semiconductor", Mouser Part Number=81-4259-63, Datasheet Link=http://www.psemi.com/pdf/datasheets/pe4259ds.pdf, Height=1.1mm, Manufacturer_Part_Number=4259-63, Mouser Price/Stock=https://www.mouser.co.uk/ProductDetail/pSemi/4259-63?qs=iw0hurA%2FaD37qvQcKdATTw%3D%3D
IC2: "Integrated Circuit", Manufacturer_Name=STMicroelectronics, Mouser Part Number=511-STM32F401RBT6, Arrow Part Number=STM32F401RBT6, Arrow Price/Stock=https://www.arrow.com/en/products/stm32f401rbt6/stmicroelectronics?region=europe, Datasheet Link=https://www.st.com/resource/en/datasheet/stm32f401cb.pdf, Height=1.6mm, Manufacturer_Part_Number=STM32F401RBT6, Mouser Price/Stock=https://www.mouser.co.uk/ProductDetail/STMicroelectronics/STM32F401RBT6?qs=4ccVDqXDOrn4COlKBEB%252BDA%3D%3D
IC3: "Integrated Circuit", Arrow Part Number=SI4463-B1B-FMR, Manufacturer_Name="Silicon Labs", Mouser Part Number=634-SI4463-B1B-FMR, Arrow Price/Stock=https://www.arrow.com/en/products/si4463-b1b-fmr/silicon-labs?utm_currency=USD&region=nac, Datasheet Link=https://www.silabs.com/documents/public/data-sheets/Si4464-63-61-60.pdf, Height=0.9mm, Manufacturer_Part_Number=Si4463-B1B-FMR, Mouser Price/Stock=https://www.mouser.co.uk/ProductDetail/Silicon-Labs/SI4463-B1B-FMR?qs=p9T7GgSe1IEZK64CVhf5Sg%3D%3D
IC4: "Integrated Circuit", Arrow Part Number=MCP9700AT-E/LT, Manufacturer_Name=Microchip, Mouser Part Number=579-MCP9700AT-E/LT, Arrow Price/Stock=https://www.arrow.com/en/products/mcp9700at-elt/microchip-technology?utm_currency=USD&region=nac, Datasheet Link=https://datasheet.datasheetarchive.com/originals/distributors/SFDatasheet-4/sf-00090116.pdf, Height=1.1mm, Manufacturer_Part_Number=MCP9700AT-E/LT, Mouser Price/Stock=https://www.mouser.co.uk/ProductDetail/Microchip-Technology/MCP9700AT-E-LT?qs=RnzODY3cU8v4O6DkGIhmqg%3D%3D
IC5: "Integrated Circuit", Arrow Part Number=LM2940IMPX-5.0/NOPB, Manufacturer_Name="Texas Instruments", Mouser Part Number=926-LM2940IMPX50NOPB, Arrow Price/Stock=https://www.arrow.com/en/products/lm2940impx-5.0nopb/texas-instruments?utm_currency=USD&region=nac, Datasheet Link=http://www.ti.com/lit/gpn/lm2940-n, Height=1.8mm, Manufacturer_Part_Number=LM2940IMPX-5.0/NOPB, Mouser Price/Stock=https://www.mouser.co.uk/ProductDetail/Texas-Instruments/LM2940IMPX-5.0-NOPB?qs=X1J7HmVL2ZELzMHXu8bpyQ%3D%3D
J1 J3: "Connector", Manufacturer_Name=Molex, Mouser Part Number=N/A, Arrow Part Number=0532610471, Arrow Price/Stock=https://www.arrow.com/en/products/0532610471/molex.html?utm_currency=USD&region=europe, Datasheet Link=https://www.molex.com/en-us/products/part-detail-pdf/532610471?display=pdf, Height=3.6mm, Manufacturer_Part_Number=0532610471, Mouser Price/Stock=https://www.mouser.co.uk/ProductDetail/Molex/0532610471?qs=PBcRNPEHKsrtKT62ep6ONg%3D%3D
J2: "Connector", Manufacturer_Name="GCT (GLOBAL CONNECTOR TECHNOLOGY)", Datasheet Link=https://www.mouser.kr/datasheet/3/1507/1/RFPC-SMA28-F.pdf, Height=9.8mm, Manufacturer_Part_Number=RFPC-SMA28-F
J4: "Connector", Manufacturer_Name=Molex, Mouser Part Number=538-53261-0671, Arrow Part Number=53261-0671, Arrow Price/Stock=https://www.arrow.com/en/products/53261-0671/molex?region=nac, Datasheet Link=https://www.molex.com/pdm_docs/sd/532610671_sd.pdf, Height=3.6mm, Manufacturer_Part_Number=53261-0671, Mouser Price/Stock=https://www.mouser.co.uk/ProductDetail/Molex/53261-0671?qs=%252B72YyncTwW9Wyr77z4J2cA%3D%3D
J5 J6: library part CMP-002-00088-1, "SMA Connector Jack, Female Socket - Board Edge, End Launch Solder", Case/Package=None, Check_prices=https://www.snapeda.com/parts/CON-SMA-EDGE-S/RF+Solutions/view-part/?ref=eda, Component Type=Standard, Design Item ID=CON-SMA-EDGE-S, Digi-Key_Part_Number=CON-SMA-EDGE-S-ND, MF="RF Solutions", MP=CON-SMA-EDGE-S, Pins=5, Purchase-URL=https://pricing.snapeda.com/search/part/CON-SMA-EDGE-S/?ref=eda, SnapEDA_Link=https://www.snapeda.com/parts/CON-SMA-EDGE-S/RF+Solutions/view-part/?ref=snap, Source=CON-SMA-EDGE-S.SchLib
J7: "Connector", Arrow Part Number=B4B-PH-SM4-TB(LF)(SN), Manufacturer_Name="JST (JAPAN SOLDERLESS TERMINALS)", Mouser Part Number=N/A, Arrow Price/Stock=https://www.arrow.com/en/products/b4b-ph-sm4-tb-lf-sn/jst-manufacturing?utm_currency=USD&region=europe, Datasheet Link=https://datasheet.datasheetarchive.com/originals/distributors/Datasheets_SAMA/75c02eb1799788a6b14d7c521ee36df4.pdf, Manufacturer_Part_Number=B4B-PH-SM4-TB(LF)(SN), Mouser Price/Stock=https://www.mouser.co.uk/ProductDetail/JST-Commercial/B4B-PH-SM4-TBLFSN?qs=QpmGXVUTftEshE2WNd%252BKhA%3D%3D
L1: library part LQW15AN40NJ00D, "LQW15AN40NJ00D", Manufacturer_Name="Murata Electronics", Mouser Part Number=81-LQW15AN40NJ00D, Arrow Part Number=LQW15AN40NJ00D, Arrow Price/Stock=https://www.arrow.com/en/products/lqw15an40nj00d/murata-manufacturing, Datasheet Link=https://search.murata.co.jp/Ceramy/image/img/P02/JELF243A-0050.pdf, Height=0.6mm, Manufacturer_Part_Number=LQW15AN40NJ00D, Mouser Price/Stock=https://www.mouser.com/Search/Refine.aspx?Keyword=81-LQW15AN40NJ00D
L2: library part LQW15AN33NJ00D, "LQW15AN33NJ00D", Manufacturer_Name="Murata Electronics", Mouser Part Number=81-LQW15AN33NJ00D, Arrow Part Number=LQW15AN33NJ00D, Arrow Price/Stock=https://www.arrow.com/en/products/lqw15an33nj00d/murata-manufacturing?region=nac, Datasheet Link=https://search.murata.co.jp/Ceramy/image/img/P02/JELF243A-0050.pdf, Height=0.6mm, Manufacturer_Part_Number=LQW15AN33NJ00D, Mouser Price/Stock=https://www.mouser.co.uk/ProductDetail/Murata-Electronics/LQW15AN33NJ00D?qs=ET5ky%252B0fbz2%252Bim80KCEoEg%3D%3D
L3 L8 L13: library part CMP-06042-006715-1, "Wire Wound RF Inductor for Automotive 220nH ±5% 280mA 2.08Ω 0603 (1608) Name: LQW18ANR22J8ZD"
L6: library part CMP-06042-004466-1, "Wire Wound RF Inductor 27nH ±3% 280mA 0.52Ω 0402 (1005) Name: LQW15AN27NH00D", Case Code (Imperial)=0402, Case Code (Metric)=1005, Current=260mA, Current Rating=280mA, DC Resistance (DCR)=520mR, Inductance=27nH, Max Operating Temperature=125°C, Min Operating Temperature=-55°C, Package Quantity=10000, Resistor Type=Wirewound, Self Resonant Frequency=3.5GHz, Test Frequency=100MHz, Tolerance=3%, Case/Package=0402, Core Material=Non-Magnetic, DC Current=280mA, Depth=0.6mm, Height=0.5mm, Height - Seated (Max)=0.024inch, Lead Free="Lead Free", Length=1mm, Max DC Current=280mA, Military Standard=Not, Mount="Surface Mount", Packaging="Tape and Reel", Q Factor=25, Shielding=Unshielded, Termination=SMD/SMT, Weight=2.8E-05oz, Width=0.02inch
L7: library part CMP-06042-001125-1, "Wire Wound RF Inductor 22nH ±3% 310mA 0.3Ω 0402 (1005) Name: LQW15AN22NH00D", Case Code (Imperial)=0402, Case Code (Metric)=1005, Current=750mA, Current Rating=310mA, DC Resistance (DCR)=300mR, Inductance=22nH, Max Operating Temperature=125°C, Min Operating Temperature=-55°C, Package Quantity=10000, Resistor Type=Wirewound, Self Resonant Frequency=4GHz, Test Frequency=100MHz, Tolerance=3%, Case/Package=0402, Core Material=Non-Magnetic, DC Current=310mA, Depth=0.7mm, Height=0.5mm, Height - Seated (Max)=0.024inch, Lead Free="Lead Free", Length=1mm, Max DC Current=310mA, Military Standard=Not, Mount="Surface Mount", Packaging="Tape and Reel", Q Factor=25, Radiation Hardening=No, Shielding=Unshielded, Termination=SMD/SMT, Weight=2.8E-05oz, Width=0.5mm
L9 L10: library part CMP-06042-009310-1, "Wire Wound RF Inductor for Automotive 17nH ±2% 1400mA 0.075Ω 0603 (1608) Name: LQW18AN17NG8ZD"
L11 L12: library part CMP-06042-006264-1, "Wire Wound RF Inductor for Automotive 36nH ±5% 910mA 0.2Ω 0603 (1608) Name: LQW18AN36NJ8ZD"
LED1 LED2 LED3 LED4 LED5 LED6: "LED", Manufacturer_Name=Lite-On, Mouser Part Number=859-LTST-C190KGKT, Arrow Part Number=LTST-C190KGKT, Arrow Price/Stock=https://www.arrow.com/en/products/ltst-c190kgkt/lite-on-technology?utm_currency=USD&region=nac, Datasheet Link=http://uk.rs-online.com/web/p/visible-leds/6920988/, Height=0.8mm, Manufacturer_Part_Number=LTST-C190KGKT, Mouser Price/Stock=https://www.mouser.co.uk/ProductDetail/Lite-On/LTST-C190KGKT?qs=205qCy6M2Q%252BAdcgwUZktqw%3D%3D
R1 R5 R6 R8 R11 R12: library part RC0603JR-070RL, "RC0603JR-070RL", Manufacturer_Name="Yageo Group", Mouser Part Number=603-RC0603JR-070RL, Arrow Part Number=RC0603JR-070RL, Arrow Price/Stock=https://www.arrow.com/en/products/rc0603jr-070rl/yageo?utm_currency=USD&region=nac, Datasheet Link=http://www.yageo.com/documents/recent/PYu-RC0603_51_RoHS_L_v5.pdf, Height=0.55mm, Manufacturer_Part_Number=RC0603JR-070RL, Mouser Price/Stock=https://www.mouser.co.uk/ProductDetail/YAGEO/RC0603JR-070RL?qs=2cAdsCoAWRGWyPcuXgGiXQ%3D%3D
R2 R3: library part CMP-26527-000128-1, "10kΩ ±1% 0.063W 0402 Thick Film Chip Resistor AEC-Q200 compliant Name: RMCF0402FT10K0", Case Code (Imperial)=0402, Case Code (Metric)=1005, Max Operating Temperature=155°C, Max Power Dissipation=63mW, Min Operating Temperature=-55°C, Power Rating=62.5mW, Resistance=10kR, Resistor Type="Thick Film", Temperature Coefficient=100ppm/°C, Tolerance=1%, Case/Package=0402, Construction=Rectangular, Contact Plating=Tin, Depth=0.5mm, Features="Automotive AEC-Q200", Height=0.016inch, Lead Free="Lead Free", Length=1mm, Military Standard=Not, Mount="Surface Mount", Number of Terminations=2, Packaging="Tape and Reel", Radiation Hardening=No, RoHS Compliant=Yes, Series=RMCF, Size Code=0402, Width=0.02inch
R4: library part CMP-2003-04707-1, "Name: RL1632R-4R70-F", Manufacturer=Susumu, Part Number=RL1632R-4R70-F
R7 R9 R14 R15 R16: library part RC0603FR-131KL, "RC0603FR-131KL", Manufacturer_Name="Yageo Group", Mouser Part Number=603-RC0603FR-131KL, Arrow Part Number=RC0603FR-131KL, Arrow Price/Stock=https://www.arrow.com/en/products/rc0603fr-131kl/yageo, Datasheet Link=http://www.yageo.com/documents/recent/PYu-RC0603_51_RoHS_L_v5.pdf, Height=0.55mm, Manufacturer_Part_Number=RC0603FR-131KL, Mouser Price/Stock=https://www.mouser.co.uk/ProductDetail/Yageo/RC0603FR-131KL?qs=EiqXWrxQq60RfsVJHVHHSQ%3D%3D
R10: library part RC0402JR-070RL, "RC0402JR-070RL", Manufacturer_Name="Yageo Group", Mouser Part Number=603-RC0402JR-070RL, Arrow Part Number=RC0402JR-070RL, Arrow Price/Stock=https://www.arrow.com/en/products/rc0402jr-070rl/yageo.html?utm_currency=USD&region=europe, Datasheet Link=https://www.yageo.com/upload/media/product/products/datasheet/rchip/PYu-RC_Group_51_RoHS_L_12.pdf, Height=0.4mm, Manufacturer_Part_Number=RC0402JR-070RL, Mouser Price/Stock=https://www.mouser.co.uk/ProductDetail/YAGEO/RC0402JR-070RL?qs=5Bml4Cp94iv7ykKkzPrwpQ%3D%3D
R13: library part AC0603FR-074K7L, "AC0603FR-074K7L", Manufacturer_Name="Yageo Group", Mouser Part Number=603-AC0603FR-074K7L, Arrow Part Number=AC0603FR-074K7L, Arrow Price/Stock=https://www.arrow.com/en/products/ac0603fr-074k7l/yageo?region=europe, Datasheet Link=https://www.mouser.in/ProductDetail/YAGEO/AC0603FR-074K7L?qs=UoPT7wUmgYKKC9qeAwzsVg%3D%3D, Height=0.55mm, Manufacturer_Part_Number=AC0603FR-074K7L, Mouser Price/Stock=https://www.mouser.co.uk/ProductDetail/YAGEO/AC0603FR-074K7L?qs=UoPT7wUmgYKKC9qeAwzsVg%3D%3D
SW1: library part CMP-011-00000-2, "Tactile Switch, SPST-NO, 0.05 A, 12 V, -25 to 70 degC, 2-Pin SMD, RoHS, Tape and Reel", Case/Package=B3U-1000, Contact Current Rating=50mA, IP Rating=IP40, Manufacturer="Omron Electronic Components", Max Contact Resistance=100mohm, Max Operating Temperature=70°C, Max Voltage Rating (DC)=12V, Min Operating Temperature=-25°C, Operating Force=153gf, Package Description="2-Pin Surface Mount Device, Body 3 x 2.5 mm", Package Quantity=3500, Resistance=0.1Ohm, Contact Material=Silver, Current Rating=50mA, Datasheet URL=http://www.omron.com/ecb/products/pdf/en-b3u.pdf, Datasheet Version=Jan-15, Manufacturer URL=http://www.omron.com/, Max Current Rating=50mA, Mounting Technology=SM, Package Reference=B3U-1000, Packaging=TapeandReel, RoHS Compliant=True, Throw Configuration=SPST, Voltage Rating=12V, Voltage Rating (DC)=12V
U2: library part CMP-2000-05330-1, "AMP, RF, LNA, 50-4000MHZ, SOT343", Current - Supply=46mA, Frequency=50MHz~4GHz, Manufacturer="RF Micro Devices", Package / Case=SC-82A,SOT-343, Standard Package=1, Supplier Device Package=SOT-343, Test Frequency=1.9GHz, Voltage - Supply=3V~5V, Category=RF/IFandRFID, Datasheet URL=http://www.rfmd.com/store/downloads/dl/file/id/27713/spf5043z_data_sheet.pdf, Datasheet Version=Jan-16, Family=RFAmplifiers, Gain=12.9dB, Manufacturer URL=http://www.qorvo.com/, Noise Figure=0.8dB, Online Catalog=RFMDAmplifiers, Other Names=689-1101-6, P1dB=22.7dB, Packaging=Digi-Reel, RF Type=Cellular,ISM,PCS, Series=-
U6: library part CMP-199891-000001-1, "Ultra High Dynamic Range Monolithic Amplifier", Manufacturer=Mini-Circuits, Max Frequency=2.7GHz, Max Junction Temp=+179°C, Max Power Dissipation=5.8W, Nominal Supply Current=350mA, Package=DL1636, Temperature="-40°C to +85°C", Temperature Range High=+85°C, Temperature Range Low=-40°C, Automotive=No, Bandwidth=0.03-2.7GHz, Category=IC, ComponentLink2Description=Datasheet, ComponentLink2URL=https://ww3.minicircuits.com/pdfs/PHA-202+.pdf, Device Class L1="Integrated Circuits (ICs)", Device Class L2="RF Semiconductors and Devices", Device Class L3="RF Amplifiers", Footprint Url=https://ww3.minicircuits.com/case_style/DL1636.pdf, Gain=12.7dB, Height=0.039inch, Ipc Land Pattern Name=DFN490X599X89-8, Lead Free=Yes, Manufacturer Part Number=PHA-202+, Noise Figure=5.4dB, Octopart=https://octopart.com/pha-202%2B-mini-circuits-107467474, P1dB=30.4dBm, RoHS=TRUE
Y1: "Crystal or Oscillator", Manufacturer_Name=ABRACON, Mouser Part Number=815-FT2MNTUM-30.0-T1, Arrow Part Number=FT2MNTUM-30.0-T1, Arrow Price/Stock=https://www.arrow.com/en/products/ft2mntum-30.0-t1/abracon?region=nac, Datasheet Link=https://abracon.com/datasheets/FT2MN.pdf, Height=1mm, Manufacturer_Part_Number=FT2MNTUM-30.0-T1, Mouser Price/Stock=https://www.mouser.co.uk/ProductDetail/ABRACON/FT2MNTUM-30.0-T1?qs=9vOqFld9vZU1LRBjatCK%2Fw%3D%3D
Y2: "Crystal or Oscillator", Manufacturer_Name=ECS, Mouser Part Number=520-T2520-33-250-ANT, Arrow Part Number=ECS-TXO-2520-33-250-AN-TR, Arrow Price/Stock=https://www.arrow.com/en/products/ecs-txo-2520-33-250-an-tr/ecs-international, Datasheet Link=https://ecsxtal.com/store/pdf/ECS-TXO-2520.pdf, Height=1mm, Manufacturer_Part_Number=ECS-TXO-2520-33-250-AN-TR, Mouser Price/Stock=https://www.mouser.co.uk/ProductDetail/ECS/ECS-TXO-2520-33-250-AN-TR?qs=KAq9QXcE8HCY8Xed3s4jaA%3D%3D

## Via types
v1: diameter 0.45, hole 0.2, TOP to BOT, 531 vias
v2: diameter 0.81, hole 0.51, TOP to BOT, 6 vias